# Altium PCB ywz0920_name.PcbDoc
Units mil, origin at the board's own origin, x right, y up, seen from the top; angles counter-clockwise.
Board outline 2385.03 x 2405.02 mil, 2 copper layers (Top Layer, Bottom Layer); 12 components, 30 nets, 138 pads, 0 vias.
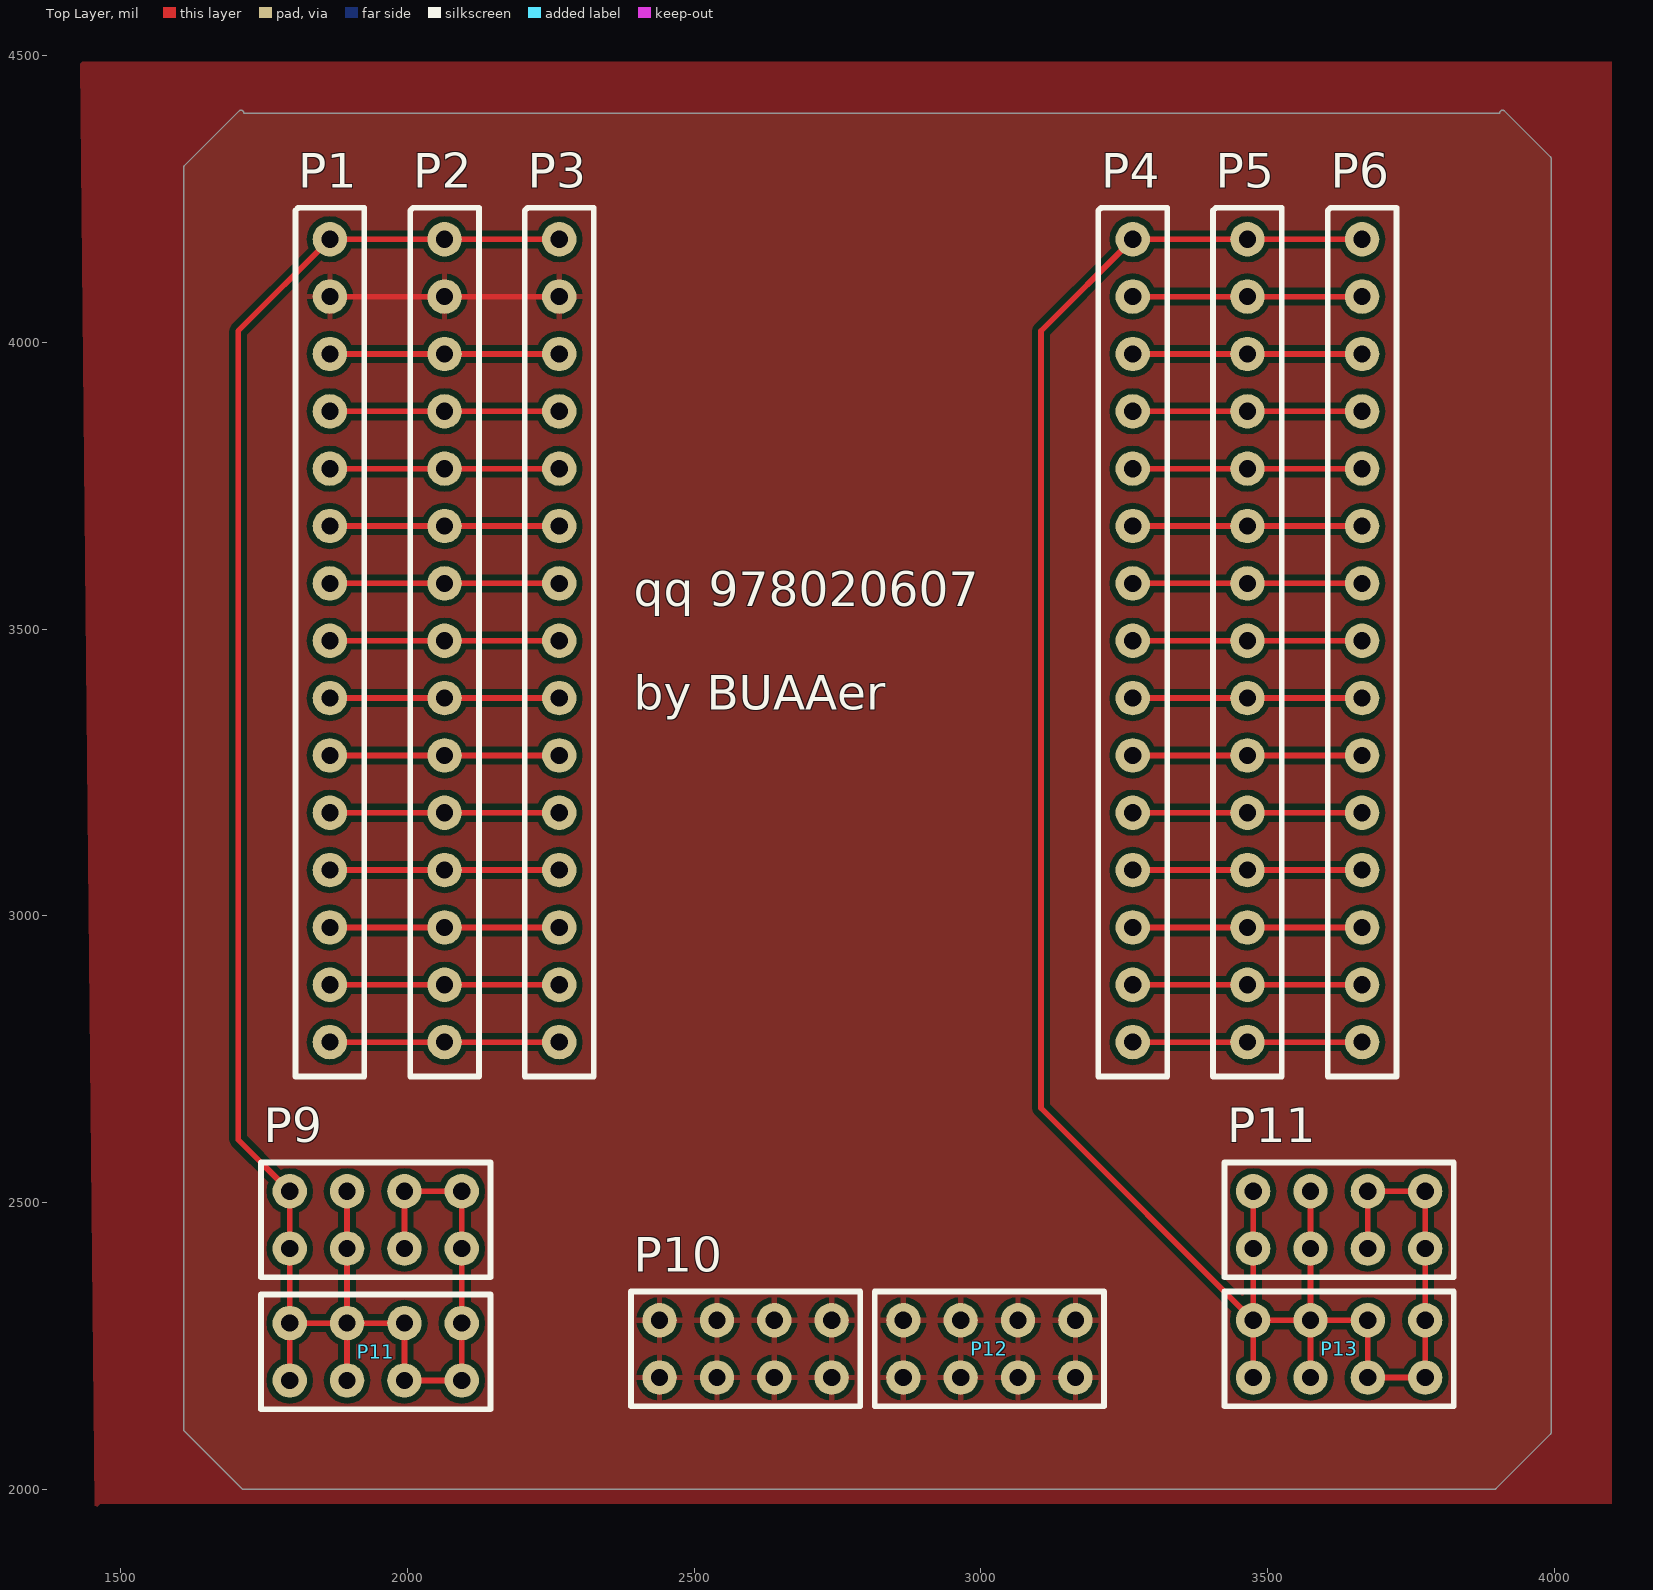
[diagram p0: Top Layer view]
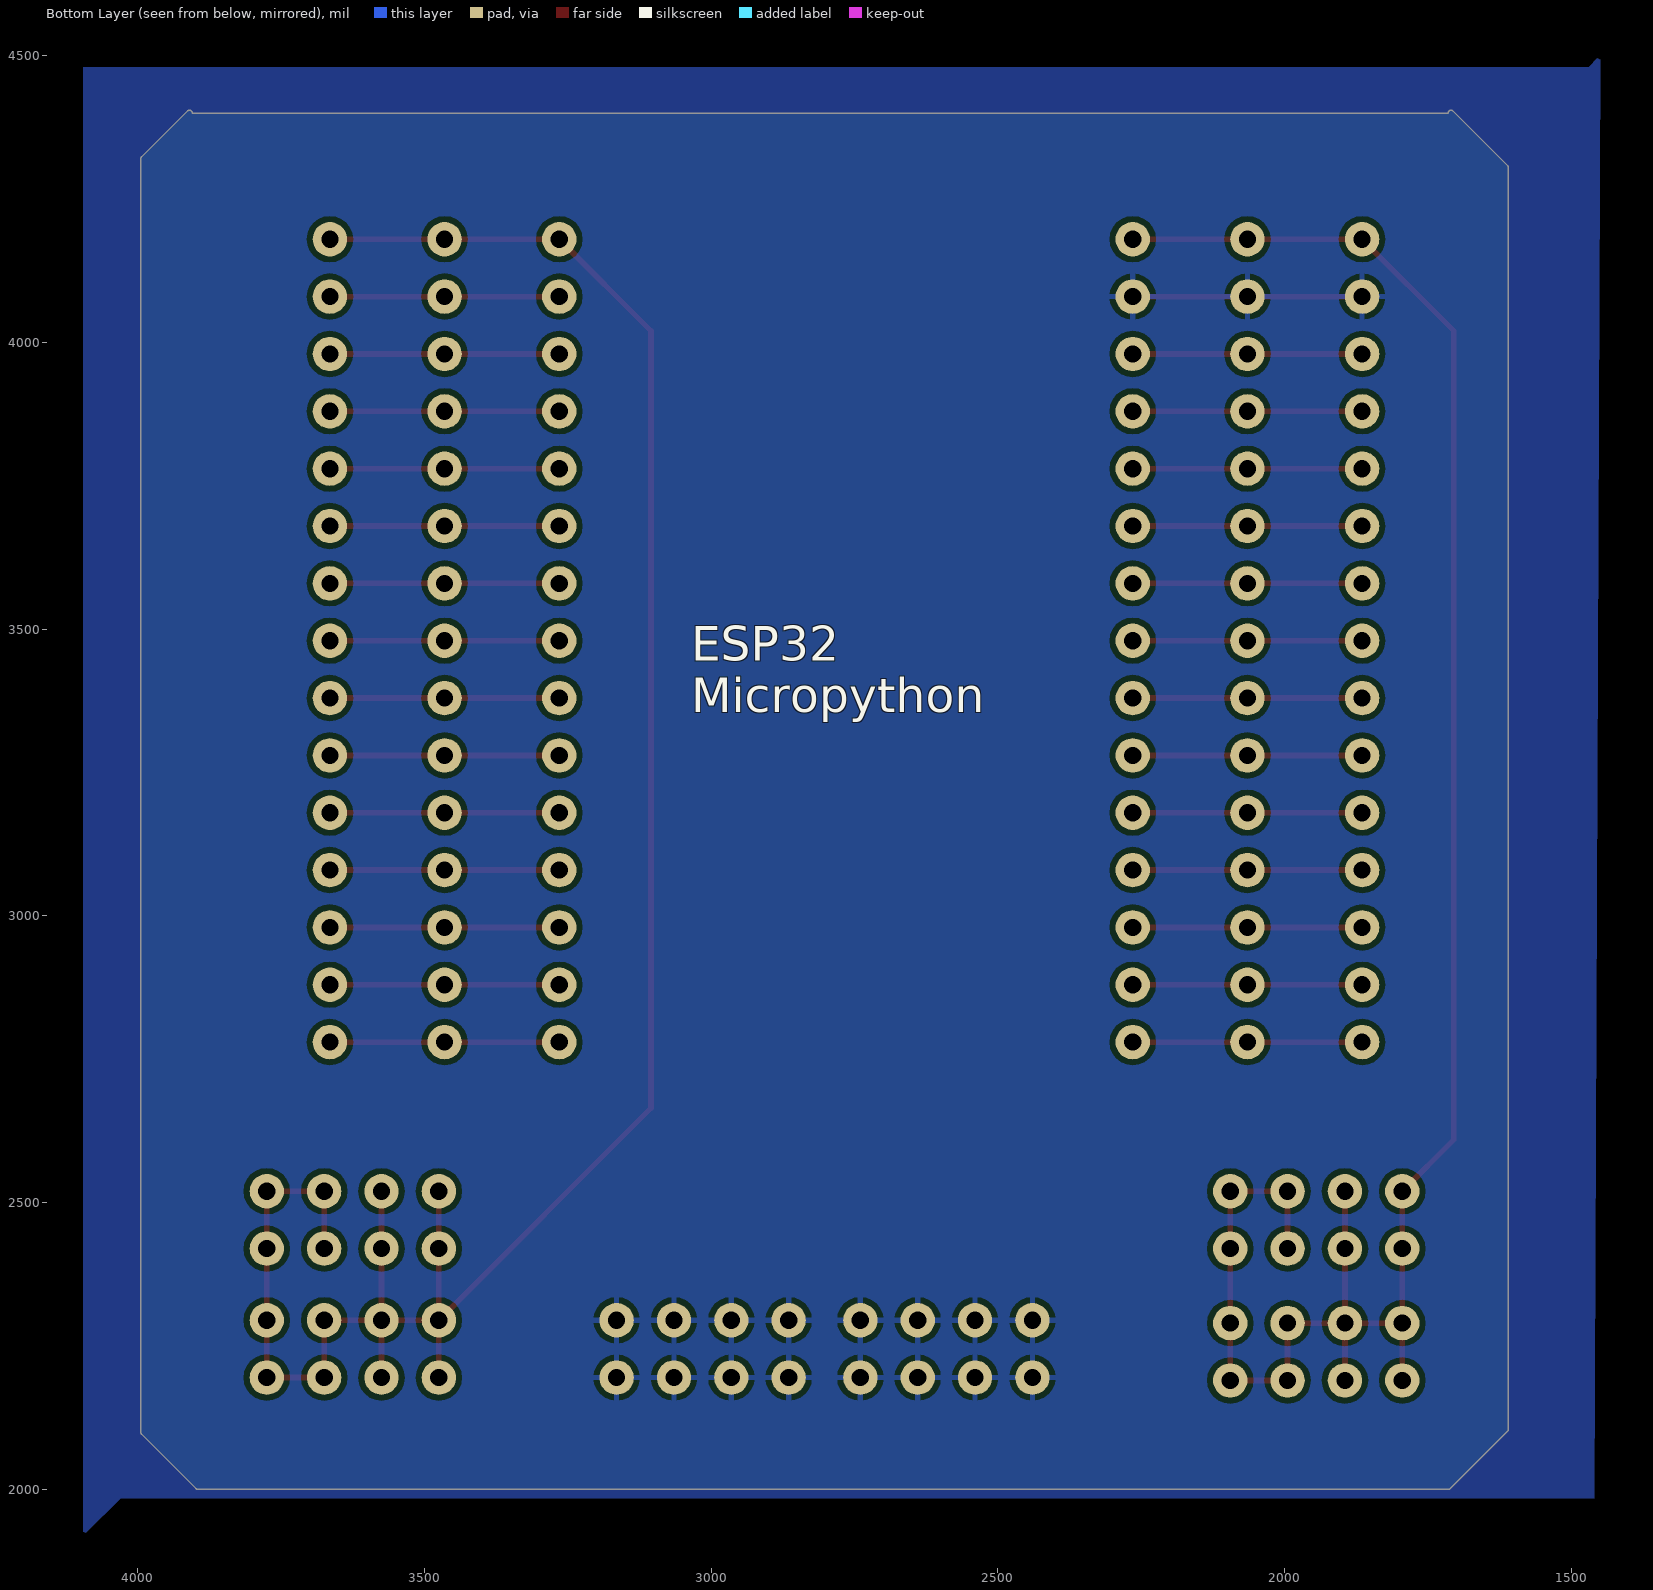
[diagram p1: Bottom Layer view, seen from below]

## Layer stack, top to bottom
Top Solder: solder mask 0.4, Solder Resist, Dk 3.5
Top Layer: signal copper 1.4
Dielectric 1: dielectric 12.6, FR-4, Dk 4.8
Bottom Layer: signal copper 1.4
Bottom Solder: solder mask 0.4, Solder Resist, Dk 3.5

## Board outline
1711.45,2001.45 1611.45,2101.45 1611.47,2101.44 cw(c1615,2105) 1609.98,2105 1609.98,4305 cw(c1615,4305) 1611.47,4308.56 1611.45,4308.55 1706.45,4403.55 cw(c1710,4400) 1715.02,4400.01 3904.99,4400.02 cw(c3910,4400) 3913.55,4403.55 3993.55,4323.55 3993.53,4323.56 cw(c3990,4320) 3995.01,4320 3995.01,2100 cw(c3990,2100) 3993.53,2096.44 3993.55,2096.45 3898.55,2001.45 3898.56,2001.47 cw(c3895,2005) 3895,1999.98 1715,1999.98 cw(c1715,2005)

## Design rules (kind name [scope] priority, off if disabled: settings)
Clearance [All] p1: gap=10 ignorepadtopadclearanceinfootprint=FALSE except(0: Arc-Hole Track-Hole SMDPad-Hole THPad-Hole Via-Hole Fill-Hole Poly-Hole Region-Hole Text-Hole)
PolygonConnect [All] p1: connectstyle=Relief reliefconductorwidth=10 reliefentries=4 polygonreliefangle="90 Angle" airgapwidth=10
RoomDefinition ywz0705_2 [InComponentClass('ywz0705_2')] p1: confinementstyle=ConfineIn formatcopy=TRUE lockcomponents=FALSE outline 1610,1995 3990,1995 3990,4405 1610,4405
RoutingVias [All] p1: holewidth=28 width=50 viastyle="Through Hole" minholewidth=28 minwidth=50 maxholewidth=28 maxwidth=50
SolderMaskExpansion [All] p1: expansion=4
Width [All] p1: maxlimit=10 minlimit=10 preferedwidth=10
30 further rules are at their usual default settings.

## Classes and differential pairs
component class ywz0705_2: P1 P2 P3 P4 P5 P6 P9 P10

## Components (designator, comment, footprint, x,y, rotation, side; value= is the part's Value field where it differs from the comment)
P1 "paizhen_15" paizhen_15 1865,2780 r0 top
P2 "paizhen_15" paizhen_15 2065,2780 r0 top
P3 "paizhen_15" paizhen_15 2265,2780 r0 top
P4 "paizhen_15" paizhen_15 3265,2780 r0 top
P5 "paizhen_15" paizhen_15 3465,2780 r0 top
P6 "paizhen_15" paizhen_15 3665,2780 r0 top
P9 "paizhen_2_4" paizhen_2_4 2095,2420 r90 top
P10 "paizhen_2_4" paizhen_2_4 2740,2195 r90 top
P11 "paizhen_2_4" paizhen_2_4 3775,2420 r90 top (schematic designator P10)
P11 "paizhen_2_4" paizhen_2_4 2095,2190 r90 top (schematic designator P9)
P12 "paizhen_2_4" paizhen_2_4 3165,2195 r90 top (schematic designator P10)
P13 "paizhen_2_4" paizhen_2_4 3775,2195 r90 top (schematic designator P10)

## Footprints (in the part's own frame and the unit in brackets; to place one, negate y for a bottom-side part, rotate by r counter-clockwise, add the part's x,y. Pads: shape width x height; smd on the part's side, far side on the other; paste and mask are expansions set on the pad)
paizhen_2_4 [mil]
  round 60 hole 30: 1(100,0) 2(100,100) 3(100,200) 4(100,300) 5(0,300) 6(0,200) 7(0,100) 8(0,0)
  silkscreen extent -50,-50 150,350
paizhen_15 [mil]
  round 60 hole 30: 1(0,0) 2(0,100) 3(0,200) 4(0,300) 5(0,400) 6(0,500) 7(0,600) 8(0,700) 9(0,800) 10(0,900) 11(0,1000) 12(0,1100) 13(0,1200) 14(0,1300) 15(0,1400)
  silkscreen extent -60,-60 60,1455

## Nets (pads, with @x,y where several pads share a name; then routed paths per layer and width w, separated by ;. In a path a pad name is that pad's centre, name@x,y a point inside that pad or via, vN(x,y) a via of type N, cw(c..) or ccw(c..) an arc to the next point about the centre after c; other vN are vias at no path point)
P1: P1.1 P2.1 P3.1 | length 400
  Top Layer w10: P1.1 P2.1 P3.1
P2: P1.2 P2.2 P3.2 | length 400
  Top Layer w10: P1.2 P2.2 P3.2
P3: P1.3 P2.3 P3.3 | length 400
  Top Layer w10: P1.3 P2.3 P3.3
P4: P1.4 P2.4 P3.4 | length 400
  Top Layer w10: P1.4 P2.4 P3.4
P5: P1.5 P2.5 P3.5 | length 400
  Top Layer w10: P1.5 P2.5 P3.5
P6: P1.6 P2.6 P3.6 | length 400
  Top Layer w10: P1.6 P2.6 P3.6
P7: P1.7 P2.7 P3.7 | length 400
  Top Layer w10: P1.7 P2.7 P3.7
P8: P1.8 P2.8 P3.8 | length 400
  Top Layer w10: P1.8 P2.8 P3.8
P9: P1.9 P2.9 P3.9 | length 400
  Top Layer w10: P1.9 P2.9 P3.9
P10: P1.10 P2.10 P3.10 | length 400
  Top Layer w10: P1.10 P2.10 P3.10
P11: P1.11 P2.11 P3.11 | length 400
  Top Layer w10: P1.11 P2.11 P3.11
P12: P1.12 P2.12 P3.12 | length 400
  Top Layer w10: P1.12 P2.12 P3.12
P13: P1.13 P2.13 P3.13 | length 400
  Top Layer w10: P1.13 P2.13 P3.13
P14: P1.14 P2.14 P3.14 P10.1 P10.2 P10.3 P10.4 P10.5 P10.6 P10.7 P10.8 P12.1 P12.2 P12.3 P12.4 P12.5 P12.6 P12.7 P12.8 | length 400
  Top Layer w10: P1.14 P2.14 P3.14
P15: P1.15 P2.15 P3.15 P9.1 P9.2 P9.3 P9.4 P9.5 P9.6 P9.7 P9.8 P11.1@2095,2290 P11.2@1995,2290 P11.3@1895,2290 P11.4@1795,2290 P11.5@1795,2190 P11.6@1895,2190 P11.7@1995,2190 P11.8@2095,2190 | length 3774.8
  Top Layer w10: P11.5@1795,2190 P11.4@1795,2290 ; P11.6@1895,2190 P11.3@1895,2290 ; P9.3 P9.6 P11.3@1895,2290 ; P9.7 P9.2 P9.1 P9.8 2095,2290 2095,2190 1995,2190 1980,2190 1995,2205 1995,2290 P11.3@1895,2290 ; P3.15 P2.15 P1.15 1705,4020 1705,2610 P9.4 P9.5 P11.4@1795,2290 ; P11.4@1795,2290 P11.3@1895,2290
P16: P4.1 P5.1 P6.1 | length 400
  Top Layer w10: P4.1 P5.1 P6.1
P17: P4.2 P5.2 P6.2 | length 400
  Top Layer w10: P4.2 P5.2 P6.2
P18: P4.3 P5.3 P6.3 | length 400
  Top Layer w10: P4.3 P5.3 P6.3
P19: P4.4 P5.4 P6.4 | length 400
  Top Layer w10: P4.4 P5.4 P6.4
P20: P4.5 P5.5 P6.5 | length 400
  Top Layer w10: P4.5 P5.5 P6.5
P21: P4.6 P5.6 P6.6 | length 400
  Top Layer w10: P4.6 P5.6 P6.6
P22: P4.7 P5.7 P6.7 | length 400
  Top Layer w10: P4.7 P5.7 P6.7
P23: P4.8 P5.8 P6.8 | length 400
  Top Layer w10: P4.8 P5.8 P6.8
P24: P4.9 P5.9 P6.9 | length 400
  Top Layer w10: P4.9 P5.9 P6.9
P25: P4.10 P5.10 P6.10 | length 400
  Top Layer w10: P4.10 P5.10 P6.10
P26: P4.11 P5.11 P6.11 | length 400
  Top Layer w10: P4.11 P5.11 P6.11
P27: P4.12 P5.12 P6.12 | length 400
  Top Layer w10: P4.12 P5.12 P6.12
P28: P4.13 P5.13 P6.13 | length 400
  Top Layer w10: P4.13 P5.13 P6.13
P29: P4.14 P5.14 P6.14 | length 400
  Top Layer w10: P4.14 P5.14 P6.14
P30: P4.15 P5.15 P6.15 P11.1@3775,2520 P11.2@3675,2520 P11.3@3575,2520 P11.4@3475,2520 P11.5@3475,2420 P11.6@3575,2420 P11.7@3675,2420 P11.8@3775,2420 P13.1 P13.2 P13.3 P13.4 P13.5 P13.6 P13.7 P13.8 | length 4059.5
  Top Layer w10: P13.5 P13.4 ; P11.4@3475,2520 3475,2420 P13.4 ; P13.6@3575,2215 P13.3 ; P11.3@3575,2520 3575,2420 P13.3 ; P6.15 P5.15 P4.15 3105,4020 3105,2665 P13.4 ; P11.7@3675,2420 3675,2520 3775,2520 3775,2420 P13.1 P13.8 P13.7 P13.2 P13.3 ; P13.4 P13.3

## Polygon pours and split planes (outlines as drawn)
P14 on Top Layer "Top Layer-P14" (solid, remove dead copper, pour order 12): 1430,4490 4100,4490 4100,1975 1465,1975 1455,1965
no net on Top Layer "Top Layer-No Net" (solid, pour order 2): 5980,4055
P14 on Bottom Layer "Bottom Layer-P14" (solid, remove dead copper, pour order 10): 1450,4500 1470,4480 4095,4480 4095,1920 4030,1985 1460,1985

## Silkscreen, mask and mechanical layers (free items; w line width, h text height)
Top Overlay:
  text "qq 978020607 /  / by BUAAer" at 2395,3360 h60
Bottom Overlay:
  text "ESP32 / Micropython" at 3035,3355 h60
Mechanical 1:
  lines w0: 1705,4400 3910,4400
  lines w10: 1710,4400 1615,4305 1615,2105 1715,2005 3895,2005 3990,2100 3990,4320 3910,4400